# EAGLE board schematic (EAGLE 7.5.0)
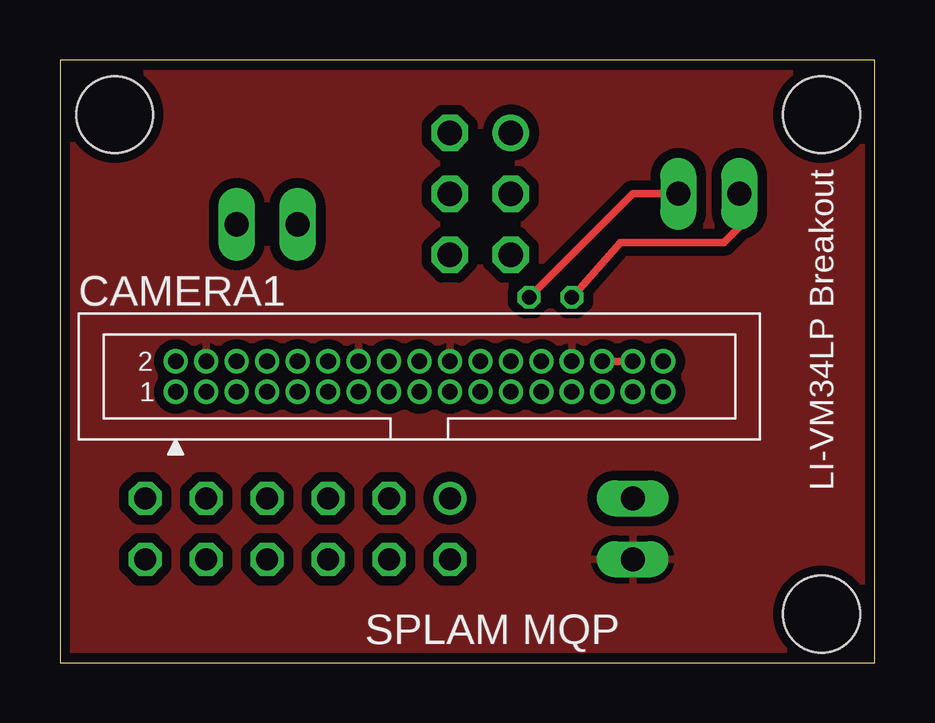
[diagram p0: board, top side]
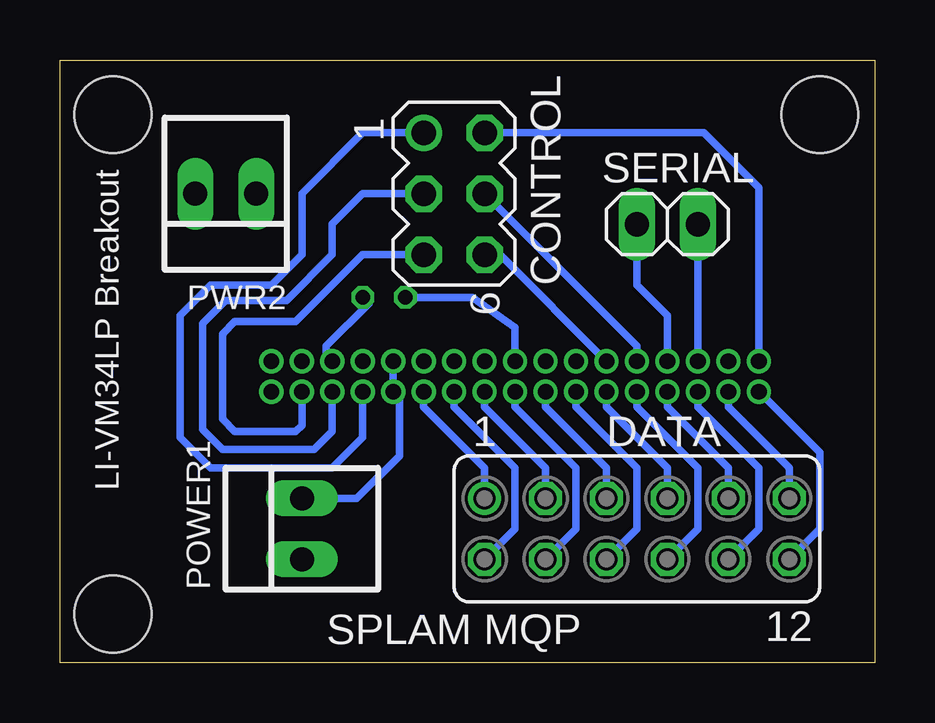
[diagram p1: board, bottom side, seen from below]

Size 33.96 x 25.14 mm. Coordinates in mm from the lower left corner, seen from the top.
Outline: 0,0 33.96,0 33.96,25.14 0,25.14 0,0
Copper layers (1*16): Top 0.0356mm / dielectric 1.5011mm / Bottom 0.0356mm
Design rules "OSHpark": minimum track width 6mil, minimum drill 13mil, track to track 6mil, track to pad 6mil, pad to pad 6mil, via to via 6mil, smd to smd 6mil, copper to edge 15mil, drill to drill 6mil, minimum pad ring 7mil, minimum via ring 7mil, stop-mask expansion 3mil, vias tented up to drill 0mil, thermal gap 10mil
Holes 3.2 mm at 2.29,22.86 31.75,2.03 31.75,22.86

## Footprints (pad centres in the part's own frame; a part is rotated, then mirrored left to right if it is on the bottom)
PHB_1MM27_2X17_SNT = drill 0.65: 1 -10.16,-0.635; 2 -10.16,0.635; 3 -8.89,-0.635; 4 -8.89,0.635; 5 -7.62,-0.635; 6 -7.62,0.635; 7 -6.35,-0.635; 8 -6.35,0.635; 9 -5.08,-0.635; 10 -5.08,0.635; 11 -3.81,-0.635; 12 -3.81,0.635; 13 -2.54,-0.635; 14 -2.54,0.635; 15 -1.27,-0.635; 16 -1.27,0.635; 17 0,-0.635; 18 0,0.635; 19 1.27,-0.635; 20 1.27,0.635; 21 2.54,-0.635; 22 2.54,0.635; 23 3.81,-0.635; 24 3.81,0.635; 25 5.08,-0.635; 26 5.08,0.635; 27 6.35,-0.635; 28 6.35,0.635; 29 7.62,-0.635; 30 7.62,0.635; 31 8.89,-0.635; 32 8.89,0.635; 33 10.16,-0.635; 34 10.16,0.635
MA03-2 = drill 1.016: 1 -2.54,-1.27 | drill 1.016 octagon: 2 -2.54,1.27; 3 0,-1.27; 4 0,1.27; 5 2.54,-1.27; 6 2.54,1.27
FE06-2 = drill 0.914: 1 -6.35,1.27 | drill 0.914 octagon: 2 -6.35,-1.27; 3 -3.81,1.27; 4 -3.81,-1.27; 5 -1.27,1.27; 6 -1.27,-1.27; 7 1.27,1.27; 8 1.27,-1.27; 9 3.81,1.27; 10 3.81,-1.27; 11 6.35,1.27; 12 6.35,-1.27
22-23-2021 = drill 1 long: 1 -1.27,0; 2 1.27,0
1X02 = drill 1.016 long: 1 -1.27,0; 2 1.27,0

## Placement (x,y rotation side)
CAMERA1  MT9V034  [PHB_1MM27_2X17_SNT]  14.99,11.94 0 top
CONTROL  [MA03-2]  17.53,19.56 270 bottom
DATA  [FE06-2]  9.91,5.59 0 bottom
POWER1  MAIN  [22-23-2021]  23.88,5.59 90 bottom
PWR2  NC  [22-23-2021]  27.05,19.56 180 bottom
SERIAL  [1X02]  8.64,18.29 180 bottom

## Library data of the parts
CAMERA1 = _hhn_con_pinhead_box_1mm27
CONTROL = con-lstb; OC_FARNELL: unknown; OC_NEWARK: unknown
DATA = con-lsta; OC_FARNELL: unknown; OC_NEWARK: unknown
POWER1 PWR2 = con-molex; MF: MOLEX; MPN: 22-23-2021; OC_FARNELL: 1462926; OC_NEWARK: 25C3832
SERIAL = pinhead

## Nets
1.8V: CAMERA1.30 CAMERA1.32 PWR2.2
2.8V: CAMERA1.18 PWR2.1
GND: CAMERA1.4 CAMERA1.14 CAMERA1.20 CAMERA1.28 POWER1.1
N$1: CAMERA1.23 DATA.1
N$2: CAMERA1.21 DATA.2
N$3: CAMERA1.19 DATA.3
N$4: CAMERA1.17 DATA.4
N$5: CAMERA1.15 DATA.5
N$6: CAMERA1.13 DATA.6
N$7: CAMERA1.11 DATA.7
N$8: CAMERA1.9 DATA.8
N$9: CAMERA1.7 DATA.9
N$10: CAMERA1.5 DATA.10
N$11: CAMERA1.3 DATA.11
N$12: CAMERA1.1 DATA.12
N$13: CAMERA1.12 CONTROL.6
N$14: CAMERA1.10 CONTROL.4
N$15: CAMERA1.2 CONTROL.2
N$16: CAMERA1.31 CONTROL.5
N$17: CAMERA1.29 CONTROL.3
N$18: CAMERA1.27 CONTROL.1
N$23: CAMERA1.8 SERIAL.2
N$24: CAMERA1.6 SERIAL.1
TRIGGER: CAMERA1.22
VCC: CAMERA1.25 CAMERA1.26 POWER1.2

## Tracks (layer width: path | path; a pad name or v marks a point on that pad's centre or on a via)
1.8V  (via drill 0.6)
  Top 0.305: CAMERA1.30 CAMERA1.32 | PWR2.2 28.32,18.16 27.69,17.53 23.37,17.53 v21.34,15.24
  Bottom 0.305: v21.34,15.24 21.08,14.99 22.86,13.21 22.86,12.83 CAMERA1.30
2.8V  (via drill 0.6)
  Top 0.305: v19.56,15.24 23.88,19.56 PWR2.1
  Bottom 0.305: CAMERA1.18 14.99,13.97 16.76,15.24 v19.56,15.24
GND
  pour Top (isolate 0.406): 0.25,24.89 0.25,0 33.78,0 33.78,24.89
N$1
  Bottom 0.305: DATA.1 16.26,8.13 18.8,10.67 CAMERA1.23
N$2
  Bottom 0.305: DATA.2 14.99,5.59 14.99,8.13 17.53,10.67 CAMERA1.21
N$3
  Bottom 0.305: DATA.3 13.72,8.13 16.26,10.67 CAMERA1.19
N$4
  Bottom 0.305: DATA.4 12.45,5.59 12.45,8.13 14.99,10.67 CAMERA1.17
N$5
  Bottom 0.305: DATA.5 11.18,8.13 13.72,10.67 CAMERA1.15
N$6
  Bottom 0.305: DATA.6 9.91,5.59 9.91,8.13 12.45,10.67 CAMERA1.13
N$7
  Bottom 0.305: DATA.7 8.64,8.13 11.18,10.67 CAMERA1.11
N$8
  Bottom 0.305: DATA.8 7.37,5.59 7.37,8.13 9.91,10.67 CAMERA1.9
N$9
  Bottom 0.305: DATA.9 6.1,8.13 8.64,10.67 CAMERA1.7
N$10
  Bottom 0.305: DATA.10 4.83,5.59 4.83,8.13 7.37,10.67 CAMERA1.5
N$11
  Bottom 0.305: DATA.11 3.56,8.13 6.1,10.67 CAMERA1.3
N$12
  Bottom 0.305: DATA.12 2.29,5.59 2.29,8.76 CAMERA1.1
N$13
  Bottom 0.305: CONTROL.6 15.62,17.02 CAMERA1.12
N$14
  Bottom 0.305: CAMERA1.10 9.91,13.21 CONTROL.4
N$15
  Bottom 0.305: CAMERA1.2 4.83,19.81 7.11,22.1 CONTROL.2
N$16
  Bottom 0.305: CONTROL.5 21.34,17.02 24.13,14.22 26.67,14.22 27.18,13.72 27.18,10.16 26.67,9.65 24.13,9.65 23.88,9.91 CAMERA1.31
N$17
  Bottom 0.305: CONTROL.3 21.34,19.56 22.61,18.29 22.61,17.02 24.51,15.11 27.05,15.11 27.69,14.48 27.69,14.47 28.01,14.15 28.01,9.72 27.18,8.89 23.37,8.89 22.61,9.65 CAMERA1.29
N$18
  Bottom 0.305: CONTROL.1 21.34,22.1 23.88,19.56 23.88,17.02 25.15,15.75 27.69,15.75 28.96,14.48 28.96,9.4 27.69,8.13 22.61,8.13 21.34,9.4 CAMERA1.27
N$23
  Bottom 0.305: SERIAL.2 9.91,15.75 8.64,14.48 CAMERA1.8
N$24
  Bottom 0.305: CAMERA1.6 SERIAL.1
VCC
  Bottom 0.305: POWER1.2 21.59,6.86 19.81,8.64 19.81,11.05 CAMERA1.25 CAMERA1.26

## Text on the board
tNames: LI-VM34LP Breakout | SPLAM MQP
bNames: LI-VM34LP Breakout | SPLAM MQP